# EAGLE board working (EAGLE 7.7.0)
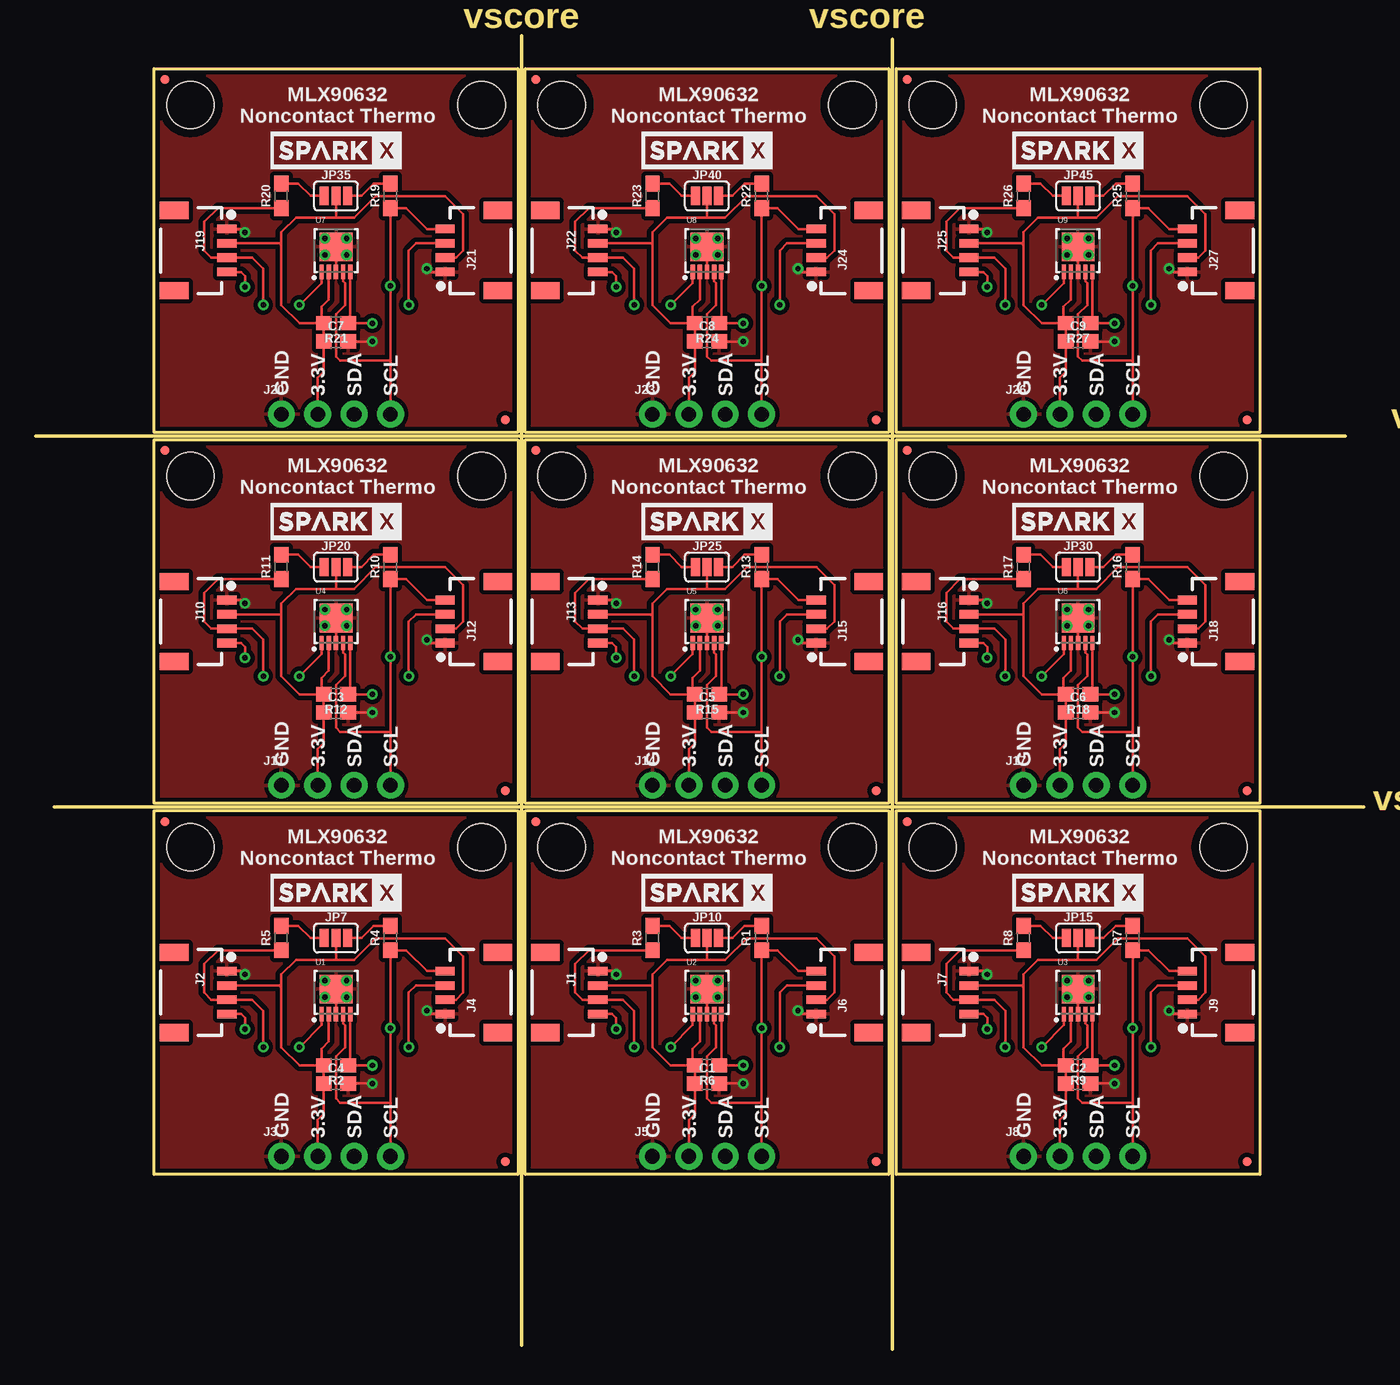
[diagram p0: board, top side]
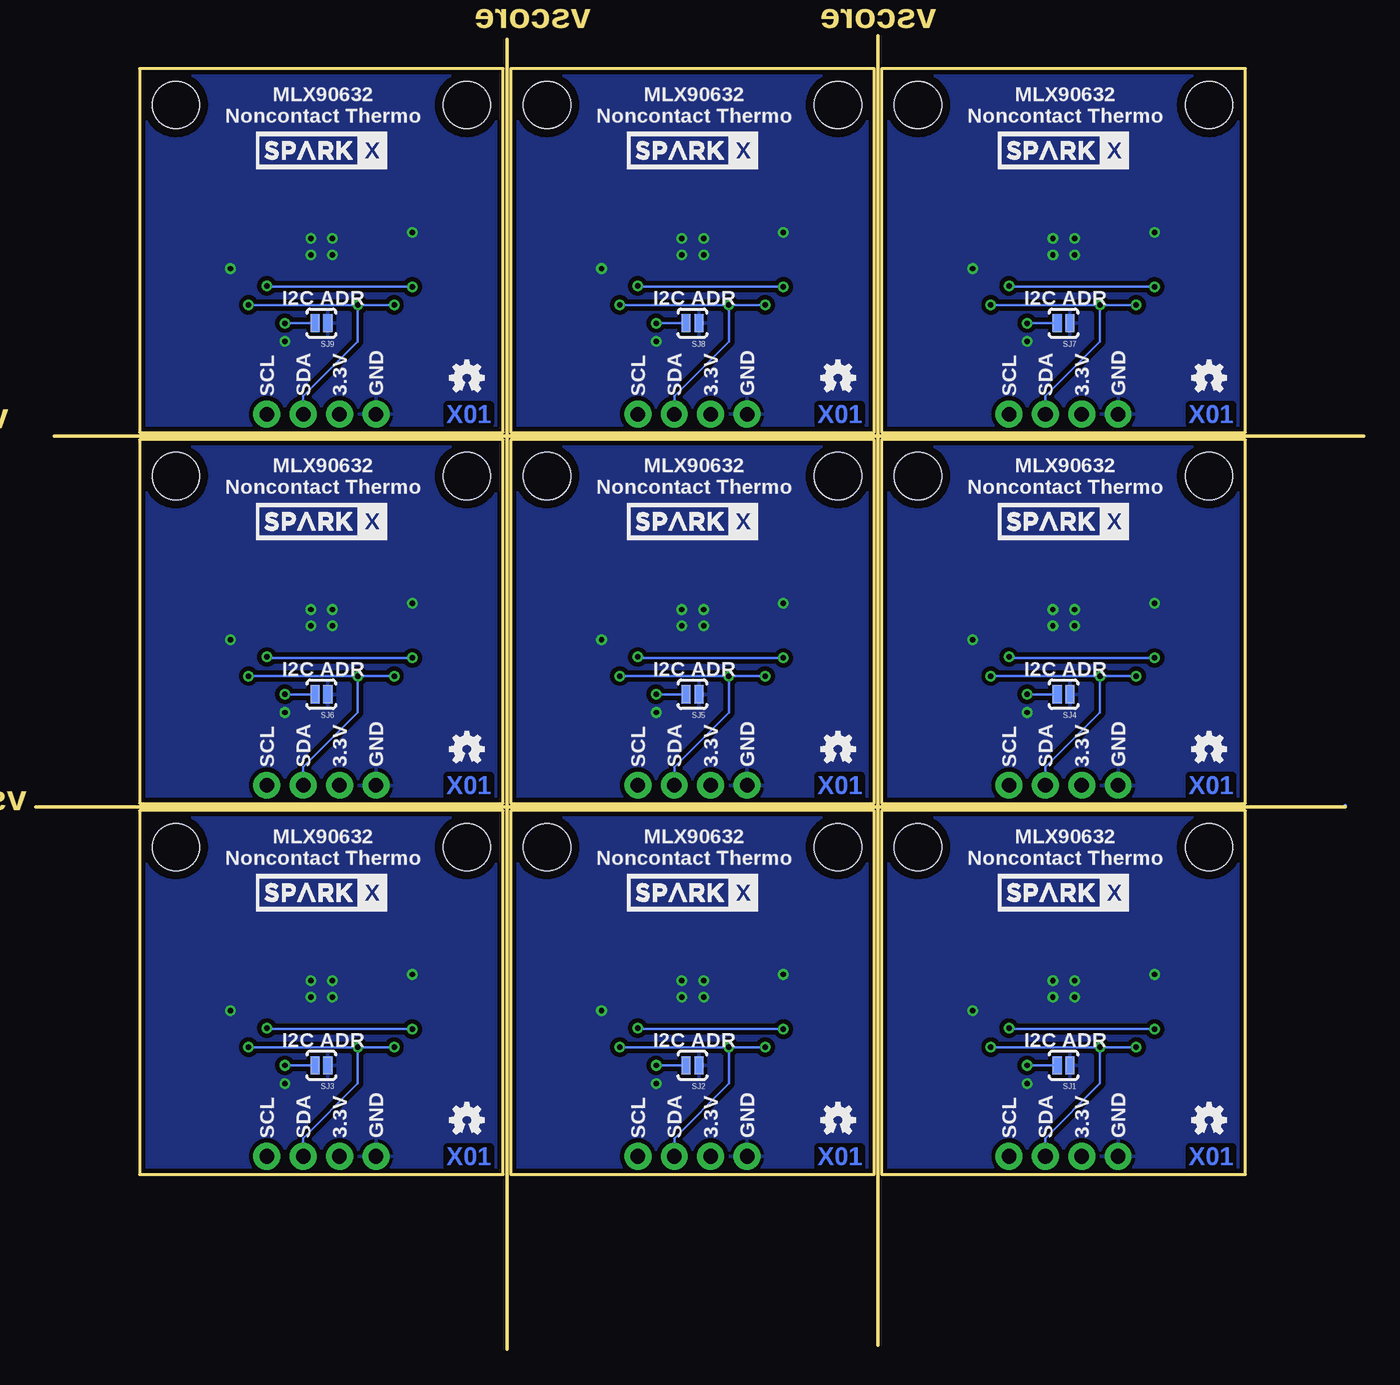
[diagram p1: board, bottom side, seen from below]

Size 92.71 x 91.69 mm. Coordinates in mm from the lower left corner, seen from the top.
Outline: 1.27,37.85 92.71,37.85
Outline: 0,63.75 91.44,63.75
Outline: 59.82,0 59.82,91.44
Outline: 33.91,0.25 33.91,91.69
Outline: 8.26,12.19 8.26,37.59 33.66,37.59 33.66,12.19 8.26,12.19
Outline: 34.16,12.19 34.16,37.59 59.56,37.59 59.56,12.19 34.16,12.19
Outline: 60.07,12.19 60.07,37.59 85.47,37.59 85.47,12.19 60.07,12.19
Outline: 8.26,38.1 8.26,63.5 33.66,63.5 33.66,38.1 8.26,38.1
Outline: 34.16,38.1 34.16,63.5 59.56,63.5 59.56,38.1 34.16,38.1
Outline: 60.07,38.1 60.07,63.5 85.47,63.5 85.47,38.1 60.07,38.1
Outline: 8.26,64.01 8.26,89.41 33.66,89.41 33.66,64.01 8.26,64.01
Outline: 34.16,64.01 34.16,89.41 59.56,89.41 59.56,64.01 34.16,64.01
Outline: 60.07,64.01 60.07,89.41 85.47,89.41 85.47,64.01 60.07,64.01
Copper layers (1*16): Top 0.035mm / dielectric 1.5mm / Bottom 0.035mm
Design rules "SparkFun-2-layer-TIGHT": minimum track width 7mil, minimum drill 15mil, track to track 7mil, track to pad 7mil, pad to pad 7mil, via to via 7mil, smd to smd 7mil, copper to edge 7mil, drill to drill 7mil, minimum pad ring 7mil, minimum via ring 7mil, stop-mask expansion 4mil, vias tented up to drill 25mil, thermal gap 10mil

## Footprints (pad centres in the part's own frame; a part is rotated, then mirrored left to right if it is on the bottom)
0603 = smd 1.1 x 1: 1 -0.85,0; 2 0.85,0
1X04_1MM_RA = smd 0.6 x 1.35: 1 -1.5,0; 2 -0.5,0; 3 0.5,0; 4 1.5,0 | smd 1.2 x 2: NC1 2.8,-3.675; NC2 -2.8,-3.675
1X04_NO_SILK = drill 1.016 pad 1.88: 1 0,0; 2 2.54,0; 3 5.08,0; 4 7.62,0
STAND-OFF = hole 3.302: 0,0
MICRO-FIDUCIAL = smd 0.635 x 0.635: 1 0,0
SMT-JUMPER_3_2-NC_PASTE_SILK = smd 0.635 x 1.27: 1 -0.813,0; 2 0,0; 3 0.813,0
SJ_2S-NO = smd 0.635 x 1.27: 1 -0.45,0; 2 0.45,0
MLX90632-3X3 = smd 0.3 x 1: 1 -1,-1.5; 2 -0.5,-1.5; 3 0,-1.5; 4 0.5,-1.5; 5 1,-1.5 | smd 2.3 x 2: 6 0,0.25

## Placement (x,y rotation side)
C1  0.1uF  [0603]  46.86,18.54 0 top
C2  0.1uF  [0603]  72.77,18.54 0 top
C3  0.1uF  [0603]  20.95,44.45 0 top
C4  0.1uF  [0603]  20.95,18.54 0 top
C5  0.1uF  [0603]  46.86,44.45 0 top
C6  0.1uF  [0603]  72.77,44.45 0 top
C7  0.1uF  [0603]  20.95,70.36 0 top
C8  0.1uF  [0603]  46.86,70.36 0 top
C9  0.1uF  [0603]  72.77,70.36 0 top
J1  SMD  [1X04_1MM_RA]  39.24,24.89 270 top
J2  SMD  [1X04_1MM_RA]  13.34,24.89 270 top
J3  PTH  [1X04_NO_SILK]  17.15,13.46 0 top
J4  SMD  [1X04_1MM_RA]  28.58,24.89 90 top
J5  PTH  [1X04_NO_SILK]  43.05,13.46 0 top
J6  SMD  [1X04_1MM_RA]  54.48,24.89 90 top
J7  SMD  [1X04_1MM_RA]  65.15,24.89 270 top
J8  PTH  [1X04_NO_SILK]  68.96,13.46 0 top
J9  SMD  [1X04_1MM_RA]  80.39,24.89 90 top
J10  SMD  [1X04_1MM_RA]  13.34,50.8 270 top
J11  PTH  [1X04_NO_SILK]  17.15,39.37 0 top
J12  SMD  [1X04_1MM_RA]  28.58,50.8 90 top
J13  SMD  [1X04_1MM_RA]  39.24,50.8 270 top
J14  PTH  [1X04_NO_SILK]  43.05,39.37 0 top
J15  SMD  [1X04_1MM_RA]  54.48,50.8 90 top
J16  SMD  [1X04_1MM_RA]  65.15,50.8 270 top
J17  PTH  [1X04_NO_SILK]  68.96,39.37 0 top
J18  SMD  [1X04_1MM_RA]  80.39,50.8 90 top
J19  SMD  [1X04_1MM_RA]  13.34,76.71 270 top
J20  PTH  [1X04_NO_SILK]  17.15,65.28 0 top
J21  SMD  [1X04_1MM_RA]  28.58,76.71 90 top
J22  SMD  [1X04_1MM_RA]  39.24,76.71 270 top
J23  PTH  [1X04_NO_SILK]  43.05,65.28 0 top
J24  SMD  [1X04_1MM_RA]  54.48,76.71 90 top
J25  SMD  [1X04_1MM_RA]  65.15,76.71 270 top
J26  PTH  [1X04_NO_SILK]  68.96,65.28 0 top
J27  SMD  [1X04_1MM_RA]  80.39,76.71 90 top
JP1  STAND-OFF  [STAND-OFF]  36.7,35.05 0 top
JP2  FIDUCIALUFIDUCIAL  [MICRO-FIDUCIAL]  32.77,13.08 0 top
JP3  STAND-OFF  [STAND-OFF]  10.8,35.05 0 top
JP4  STAND-OFF  [STAND-OFF]  31.12,35.05 0 top
JP5  STAND-OFF  [STAND-OFF]  57.02,35.05 0 top
JP6  FIDUCIALUFIDUCIAL  [MICRO-FIDUCIAL]  9.02,36.83 0 top
JP7  [SMT-JUMPER_3_2-NC_PASTE_SILK]  20.95,28.7 0 top
JP8  FIDUCIALUFIDUCIAL  [MICRO-FIDUCIAL]  58.67,13.08 0 top
JP9  FIDUCIALUFIDUCIAL  [MICRO-FIDUCIAL]  34.93,36.83 0 top
JP10  [SMT-JUMPER_3_2-NC_PASTE_SILK]  46.86,28.7 0 top
JP11  STAND-OFF  [STAND-OFF]  62.61,35.05 0 top
JP12  STAND-OFF  [STAND-OFF]  82.93,35.05 0 top
JP13  FIDUCIALUFIDUCIAL  [MICRO-FIDUCIAL]  84.58,13.08 0 top
JP14  FIDUCIALUFIDUCIAL  [MICRO-FIDUCIAL]  60.83,36.83 0 top
JP15  [SMT-JUMPER_3_2-NC_PASTE_SILK]  72.77,28.7 0 top
JP16  STAND-OFF  [STAND-OFF]  10.8,60.96 0 top
JP17  STAND-OFF  [STAND-OFF]  31.12,60.96 0 top
JP18  FIDUCIALUFIDUCIAL  [MICRO-FIDUCIAL]  32.77,38.99 0 top
JP19  FIDUCIALUFIDUCIAL  [MICRO-FIDUCIAL]  9.02,62.74 0 top
JP20  [SMT-JUMPER_3_2-NC_PASTE_SILK]  20.95,54.61 0 top
JP21  STAND-OFF  [STAND-OFF]  36.7,60.96 0 top
JP22  STAND-OFF  [STAND-OFF]  57.02,60.96 0 top
JP23  FIDUCIALUFIDUCIAL  [MICRO-FIDUCIAL]  58.67,38.99 0 top
JP24  FIDUCIALUFIDUCIAL  [MICRO-FIDUCIAL]  34.93,62.74 0 top
JP25  [SMT-JUMPER_3_2-NC_PASTE_SILK]  46.86,54.61 0 top
JP26  STAND-OFF  [STAND-OFF]  62.61,60.96 0 top
JP27  STAND-OFF  [STAND-OFF]  82.93,60.96 0 top
JP28  FIDUCIALUFIDUCIAL  [MICRO-FIDUCIAL]  84.58,38.99 0 top
JP29  FIDUCIALUFIDUCIAL  [MICRO-FIDUCIAL]  60.83,62.74 0 top
JP30  [SMT-JUMPER_3_2-NC_PASTE_SILK]  72.77,54.61 0 top
JP31  STAND-OFF  [STAND-OFF]  10.8,86.87 0 top
JP32  STAND-OFF  [STAND-OFF]  31.12,86.87 0 top
JP33  FIDUCIALUFIDUCIAL  [MICRO-FIDUCIAL]  32.77,64.9 0 top
JP34  FIDUCIALUFIDUCIAL  [MICRO-FIDUCIAL]  9.02,88.65 0 top
JP35  [SMT-JUMPER_3_2-NC_PASTE_SILK]  20.95,80.52 0 top
JP36  STAND-OFF  [STAND-OFF]  36.7,86.87 0 top
JP37  STAND-OFF  [STAND-OFF]  57.02,86.87 0 top
JP38  FIDUCIALUFIDUCIAL  [MICRO-FIDUCIAL]  58.67,64.9 0 top
JP39  FIDUCIALUFIDUCIAL  [MICRO-FIDUCIAL]  34.93,88.65 0 top
JP40  [SMT-JUMPER_3_2-NC_PASTE_SILK]  46.86,80.52 0 top
JP41  STAND-OFF  [STAND-OFF]  62.61,86.87 0 top
JP42  STAND-OFF  [STAND-OFF]  82.93,86.87 0 top
JP43  FIDUCIALUFIDUCIAL  [MICRO-FIDUCIAL]  84.58,64.9 0 top
JP44  FIDUCIALUFIDUCIAL  [MICRO-FIDUCIAL]  60.83,88.65 0 top
JP45  [SMT-JUMPER_3_2-NC_PASTE_SILK]  72.77,80.52 0 top
LOGO1  OSHW-LOGOMINI  [OSHW-LOGO-MINI]  10.8,16 0 bottom
LOGO2  OSHW-LOGOMINI  [OSHW-LOGO-MINI]  36.7,16 0 bottom
LOGO3  OSHW-LOGOMINI  [OSHW-LOGO-MINI]  62.61,16 0 bottom
LOGO4  OSHW-LOGOMINI  [OSHW-LOGO-MINI]  10.8,41.91 0 bottom
LOGO5  OSHW-LOGOMINI  [OSHW-LOGO-MINI]  36.7,41.91 0 bottom
LOGO6  OSHW-LOGOMINI  [OSHW-LOGO-MINI]  62.61,41.91 0 bottom
LOGO7  OSHW-LOGOMINI  [OSHW-LOGO-MINI]  10.8,67.82 0 bottom
LOGO8  OSHW-LOGOMINI  [OSHW-LOGO-MINI]  36.7,67.82 0 bottom
LOGO9  OSHW-LOGOMINI  [OSHW-LOGO-MINI]  62.61,67.82 0 bottom
R1  4.7k  [0603]  50.67,28.7 90 top
R2  10k  [0603]  20.95,19.81 180 top
R3  4.7k  [0603]  43.05,28.7 90 top
R4  4.7k  [0603]  24.77,28.7 90 top
R5  4.7k  [0603]  17.15,28.7 90 top
R6  10k  [0603]  46.86,19.81 180 top
R7  4.7k  [0603]  76.58,28.7 90 top
R8  4.7k  [0603]  68.96,28.7 90 top
R9  10k  [0603]  72.77,19.81 180 top
R10  4.7k  [0603]  24.77,54.61 90 top
R11  4.7k  [0603]  17.15,54.61 90 top
R12  10k  [0603]  20.95,45.72 180 top
R13  4.7k  [0603]  50.67,54.61 90 top
R14  4.7k  [0603]  43.05,54.61 90 top
R15  10k  [0603]  46.86,45.72 180 top
R16  4.7k  [0603]  76.58,54.61 90 top
R17  4.7k  [0603]  68.96,54.61 90 top
R18  10k  [0603]  72.77,45.72 180 top
R19  4.7k  [0603]  24.77,80.52 90 top
R20  4.7k  [0603]  17.15,80.52 90 top
R21  10k  [0603]  20.95,71.63 180 top
R22  4.7k  [0603]  50.67,80.52 90 top
R23  4.7k  [0603]  43.05,80.52 90 top
R24  10k  [0603]  46.86,71.63 180 top
R25  4.7k  [0603]  76.58,80.52 90 top
R26  4.7k  [0603]  68.96,80.52 90 top
R27  10k  [0603]  72.77,71.63 180 top
SJ1  [SJ_2S-NO]  20.95,19.81 180 bottom
SJ2  [SJ_2S-NO]  46.86,19.81 180 bottom
SJ3  [SJ_2S-NO]  72.77,19.81 180 bottom
SJ4  [SJ_2S-NO]  20.95,45.72 180 bottom
SJ5  [SJ_2S-NO]  46.86,45.72 180 bottom
SJ6  [SJ_2S-NO]  72.77,45.72 180 bottom
SJ7  [SJ_2S-NO]  20.95,71.63 180 bottom
SJ8  [SJ_2S-NO]  46.86,71.63 180 bottom
SJ9  [SJ_2S-NO]  72.77,71.63 180 bottom
U1  MLX90632  [MLX90632-3X3]  20.95,24.89 0 top
U2  MLX90632  [MLX90632-3X3]  46.86,24.89 0 top
U3  MLX90632  [MLX90632-3X3]  72.77,24.89 0 top
U4  MLX90632  [MLX90632-3X3]  20.95,50.8 0 top
U5  MLX90632  [MLX90632-3X3]  46.86,50.8 0 top
U6  MLX90632  [MLX90632-3X3]  72.77,50.8 0 top
U7  MLX90632  [MLX90632-3X3]  20.95,76.71 0 top
U8  MLX90632  [MLX90632-3X3]  46.86,76.71 0 top
U9  MLX90632  [MLX90632-3X3]  72.77,76.71 0 top
U$1  SPARKX-LOGO4  [SPARKX-MEDIUM]  20.95,31.88 0 bottom
U$2  SPARKX-LOGO4  [SPARKX-MEDIUM]  20.95,31.88 0 top
U$3  SPARKX-LOGO4  [SPARKX-MEDIUM]  46.86,31.88 0 top
U$4  SPARKX-LOGO4  [SPARKX-MEDIUM]  46.86,31.88 0 bottom
U$5  SPARKX-LOGO4  [SPARKX-MEDIUM]  72.77,31.88 0 top
U$6  SPARKX-LOGO4  [SPARKX-MEDIUM]  72.77,31.88 0 bottom
U$7  SPARKX-LOGO4  [SPARKX-MEDIUM]  20.95,57.79 0 top
U$8  SPARKX-LOGO4  [SPARKX-MEDIUM]  20.95,57.79 0 bottom
U$9  SPARKX-LOGO4  [SPARKX-MEDIUM]  46.86,57.79 0 top
U$10  SPARKX-LOGO4  [SPARKX-MEDIUM]  46.86,57.79 0 bottom
U$11  SPARKX-LOGO4  [SPARKX-MEDIUM]  72.77,57.79 0 top
U$12  SPARKX-LOGO4  [SPARKX-MEDIUM]  72.77,57.79 0 bottom
U$13  SPARKX-LOGO4  [SPARKX-MEDIUM]  20.95,83.69 0 top
U$14  SPARKX-LOGO4  [SPARKX-MEDIUM]  20.95,83.69 0 bottom
U$15  SPARKX-LOGO4  [SPARKX-MEDIUM]  46.86,83.69 0 top
U$16  SPARKX-LOGO4  [SPARKX-MEDIUM]  46.86,83.69 0 bottom
U$17  SPARKX-LOGO4  [SPARKX-MEDIUM]  72.77,83.69 0 top
U$18  SPARKX-LOGO4  [SPARKX-MEDIUM]  72.77,83.69 0 bottom

## Library data of the parts
C1-C9 = SparkFun-Capacitors; PROD_ID: CAP-00810
J1-J27 U$1-U$18 = SparkX
JP1-JP6 JP8 JP9 JP11-JP14 JP16-JP19 JP21-JP24 JP26-JP29 JP31-JP34 JP36-JP39 JP41-JP44 SJ1-SJ9 = SparkFun
JP7 JP10 JP15 JP20 JP25 JP30 JP35 JP40 JP45 = SparkFun-Jumpers
LOGO1-LOGO9 = SparkFun-Aesthetics
R1 R3-R5 R7 R8 R10 R11 R13 R14 R16 R17 R19 R20 R22 R23 R25 R26 = SparkFun-Resistors; PROD_ID: RES-07857
R2 R6 R9 R12 R15 R18 R21 R24 R27 = SparkFun-Resistors; PROD_ID: RES-00824
U1-U9 = MLX90632

## Nets
3.3V: C4.1 J2.2 J3.2 J4.2 JP7.2 R2.2 U1.2
3.3V1: C1.1 J1.2 J5.2 J6.2 JP10.2 R6.2 U2.2
3.3V2: C2.1 J7.2 J8.2 J9.2 JP15.2 R9.2 U3.2
3.3V3: C3.1 J10.2 J11.2 J12.2 JP20.2 R12.2 U4.2
3.3V4: C5.1 J13.2 J14.2 J15.2 JP25.2 R15.2 U5.2
3.3V5: C6.1 J16.2 J17.2 J18.2 JP30.2 R18.2 U6.2
3.3V6: C7.1 J19.2 J20.2 J21.2 JP35.2 R21.2 U7.2
3.3V7: C8.1 J22.2 J23.2 J24.2 JP40.2 R24.2 U8.2
3.3V8: C9.1 J25.2 J26.2 J27.2 JP45.2 R27.2 U9.2
ADDR: R2.1 SJ1.2 U1.5
ADDR1: R6.1 SJ2.2 U2.5
ADDR2: R9.1 SJ3.2 U3.5
ADDR3: R12.1 SJ4.2 U4.5
ADDR4: R15.1 SJ5.2 U5.5
ADDR5: R18.1 SJ6.2 U6.5
ADDR6: R21.1 SJ7.2 U7.5
ADDR7: R24.1 SJ8.2 U8.5
ADDR8: R27.1 SJ9.2 U9.5
GND: C4.2 J2.1 J3.1 J4.1 SJ1.1 U1.3 U1.6
GND1: C1.2 J1.1 J5.1 J6.1 SJ2.1 U2.3 U2.6
GND2: C2.2 J7.1 J8.1 J9.1 SJ3.1 U3.3 U3.6
GND3: C3.2 J10.1 J11.1 J12.1 SJ4.1 U4.3 U4.6
GND4: C5.2 J13.1 J14.1 J15.1 SJ5.1 U5.3 U5.6
GND5: C6.2 J16.1 J17.1 J18.1 SJ6.1 U6.3 U6.6
GND6: C7.2 J19.1 J20.1 J21.1 SJ7.1 U7.3 U7.6
GND7: C8.2 J22.1 J23.1 J24.1 SJ8.1 U8.3 U8.6
GND8: C9.2 J25.1 J26.1 J27.1 SJ9.1 U9.3 U9.6
N$1: JP7.1 R5.2
N$2: JP7.3 R4.2
N$3: JP10.1 R3.2
N$4: JP10.3 R1.2
N$5: JP15.1 R8.2
N$6: JP15.3 R7.2
N$7: JP20.1 R11.2
N$8: JP20.3 R10.2
N$9: JP25.1 R14.2
N$10: JP25.3 R13.2
N$11: JP30.1 R17.2
N$12: JP30.3 R16.2
N$13: JP35.1 R20.2
N$14: JP35.3 R19.2
N$15: JP40.1 R23.2
N$16: JP40.3 R22.2
N$17: JP45.1 R26.2
N$18: JP45.3 R25.2
SCL: J2.4 J3.4 J4.4 R4.1 U1.4
SCL1: J1.4 J5.4 J6.4 R1.1 U2.4
SCL2: J7.4 J8.4 J9.4 R7.1 U3.4
SCL3: J10.4 J11.4 J12.4 R10.1 U4.4
SCL4: J13.4 J14.4 J15.4 R13.1 U5.4
SCL5: J16.4 J17.4 J18.4 R16.1 U6.4
SCL6: J19.4 J20.4 J21.4 R19.1 U7.4
SCL7: J22.4 J23.4 J24.4 R22.1 U8.4
SCL8: J25.4 J26.4 J27.4 R25.1 U9.4
SDA: J2.3 J3.3 J4.3 R5.1 U1.1
SDA1: J1.3 J5.3 J6.3 R3.1 U2.1
SDA2: J7.3 J8.3 J9.3 R8.1 U3.1
SDA3: J10.3 J11.3 J12.3 R11.1 U4.1
SDA4: J13.3 J14.3 J15.3 R14.1 U5.1
SDA5: J16.3 J17.3 J18.3 R17.1 U6.1
SDA6: J19.3 J20.3 J21.3 R20.1 U7.1
SDA7: J22.3 J23.3 J24.3 R23.1 U8.1
SDA8: J25.3 J26.3 J27.3 R26.1 U9.1

## Tracks (layer width: path | path; a pad name or v marks a point on that pad's centre or on a via)
3.3V
  Top 0.178: U1.2 20.45,21.47 19.94,20.95 19.94,19.98 R2.2 | J3.2 19.69,16 20.11,16.42 R2.2 | R2.2 18.41,19.81 17.15,21.08 17.15,25.27 | 17.15,25.27 17.15,26.16 18.16,27.18 20.95,27.18 | J2.2 17.03,25.39 17.15,25.27 | J4.2 29.34,24.39 29.84,24.89 29.84,27.43 28.59,28.69 23.74,28.69 22.23,27.18 20.95,27.18 | JP7.2 20.95,27.18 | R2.2 C4.1
3.3V1
  Top 0.178: U2.2 46.36,21.47 45.85,20.95 45.85,19.98 R6.2 | J5.2 45.59,16 46.01,16.42 R6.2 | R6.2 44.32,19.81 43.05,21.08 43.05,25.27 | 43.05,25.27 43.05,26.16 44.07,27.18 46.86,27.18 | J1.2 42.93,25.39 43.05,25.27 | J6.2 55.25,24.39 55.75,24.89 55.75,27.43 54.49,28.69 49.65,28.69 48.13,27.18 46.86,27.18 | JP10.2 46.86,27.18 | R6.2 C1.1
3.3V2
  Top 0.178: U3.2 72.27,21.47 71.75,20.95 71.75,19.98 R9.2 | J8.2 71.5,16 71.92,16.42 R9.2 | R9.2 70.23,19.81 68.96,21.08 68.96,25.27 | 68.96,25.27 68.96,26.16 69.98,27.18 72.77,27.18 | J7.2 68.84,25.39 68.96,25.27 | J9.2 81.16,24.39 81.66,24.89 81.66,27.43 80.4,28.69 75.55,28.69 74.04,27.18 72.77,27.18 | JP15.2 72.77,27.18 | R9.2 C2.1
3.3V3
  Top 0.178: U4.2 20.45,47.38 19.94,46.86 19.94,45.89 R12.2 | J11.2 19.69,41.91 20.11,42.33 R12.2 | R12.2 18.41,45.72 17.15,46.99 17.15,51.18 | 17.15,51.18 17.15,52.07 18.16,53.09 20.95,53.09 | J10.2 17.03,51.3 17.15,51.18 | J12.2 29.34,50.3 29.84,50.8 29.84,53.34 28.59,54.6 23.74,54.6 22.23,53.09 20.95,53.09 | JP20.2 20.95,53.09 | R12.2 C3.1
3.3V4
  Top 0.178: U5.2 46.36,47.38 45.85,46.86 45.85,45.89 R15.2 | J14.2 45.59,41.91 46.01,42.33 R15.2 | R15.2 44.32,45.72 43.05,46.99 43.05,51.18 | 43.05,51.18 43.05,52.07 44.07,53.09 46.86,53.09 | J13.2 42.93,51.3 43.05,51.18 | J15.2 55.25,50.3 55.75,50.8 55.75,53.34 54.49,54.6 49.65,54.6 48.13,53.09 46.86,53.09 | JP25.2 46.86,53.09 | R15.2 C5.1
3.3V5
  Top 0.178: U6.2 72.27,47.38 71.75,46.86 71.75,45.89 R18.2 | J17.2 71.5,41.91 71.92,42.33 R18.2 | R18.2 70.23,45.72 68.96,46.99 68.96,51.18 | 68.96,51.18 68.96,52.07 69.98,53.09 72.77,53.09 | J16.2 68.84,51.3 68.96,51.18 | J18.2 81.16,50.3 81.66,50.8 81.66,53.34 80.4,54.6 75.55,54.6 74.04,53.09 72.77,53.09 | JP30.2 72.77,53.09 | R18.2 C6.1
3.3V6
  Top 0.178: U7.2 20.45,73.29 19.94,72.77 19.94,71.79 R21.2 | J20.2 19.69,67.82 20.11,68.24 R21.2 | R21.2 18.41,71.63 17.15,72.9 17.15,77.09 | 17.15,77.09 17.15,77.98 18.16,78.99 20.95,78.99 | J19.2 17.03,77.21 17.15,77.09 | J21.2 29.34,76.21 29.84,76.71 29.84,79.25 28.59,80.51 23.74,80.51 22.23,78.99 20.95,78.99 | JP35.2 20.95,78.99 | R21.2 C7.1
3.3V7
  Top 0.178: U8.2 46.36,73.29 45.85,72.77 45.85,71.79 R24.2 | J23.2 45.59,67.82 46.01,68.24 R24.2 | R24.2 44.32,71.63 43.05,72.9 43.05,77.09 | 43.05,77.09 43.05,77.98 44.07,78.99 46.86,78.99 | J22.2 42.93,77.21 43.05,77.09 | J24.2 55.25,76.21 55.75,76.71 55.75,79.25 54.49,80.51 49.65,80.51 48.13,78.99 46.86,78.99 | JP40.2 46.86,78.99 | R24.2 C8.1
3.3V8
  Top 0.178: U9.2 72.27,73.29 71.75,72.77 71.75,71.79 R27.2 | J26.2 71.5,67.82 71.92,68.24 R27.2 | R27.2 70.23,71.63 68.96,72.9 68.96,77.09 | 68.96,77.09 68.96,77.98 69.98,78.99 72.77,78.99 | J25.2 68.84,77.21 68.96,77.09 | J27.2 81.16,76.21 81.66,76.71 81.66,79.25 80.4,80.51 75.55,80.51 74.04,78.99 72.77,78.99 | JP45.2 72.77,78.99 | R27.2 C9.1
ADDR  (via drill 0.38)
  Top 0.178: U1.5 21.95,19.96 R2.1 v23.5,19.81
  Bottom 0.178: SJ1.2 v23.5,19.81
ADDR1  (via drill 0.38)
  Top 0.178: U2.5 47.86,19.96 R6.1 v49.4,19.81
  Bottom 0.178: SJ2.2 v49.4,19.81
ADDR2  (via drill 0.38)
  Top 0.178: U3.5 73.77,19.96 R9.1 v75.31,19.81
  Bottom 0.178: SJ3.2 v75.31,19.81
ADDR3  (via drill 0.38)
  Top 0.178: U4.5 21.95,45.87 R12.1 v23.5,45.72
  Bottom 0.178: SJ4.2 v23.5,45.72
ADDR4  (via drill 0.38)
  Top 0.178: U5.5 47.86,45.87 R15.1 v49.4,45.72
  Bottom 0.178: SJ5.2 v49.4,45.72
ADDR5  (via drill 0.38)
  Top 0.178: U6.5 73.77,45.87 R18.1 v75.31,45.72
  Bottom 0.178: SJ6.2 v75.31,45.72
ADDR6  (via drill 0.38)
  Top 0.178: U7.5 21.95,71.78 R21.1 v23.5,71.63
  Bottom 0.178: SJ7.2 v23.5,71.63
ADDR7  (via drill 0.38)
  Top 0.178: U8.5 47.86,71.78 R24.1 v49.4,71.63
  Bottom 0.178: SJ8.2 v49.4,71.63
ADDR8  (via drill 0.38)
  Top 0.178: U9.5 73.77,71.78 R27.1 v75.31,71.63
  Bottom 0.178: SJ9.2 v75.31,71.63
GND  (via drill 0.38)
  Top 0.178: U1.3 U1.6 21.15,25.14 v21.7,24.59 | J4.1 27.54,23.39 v27.3,23.62 | J2.1 14.38,26.39 v14.61,26.16 | C4.2 v23.5,18.54
  other vias: 20.18,25.73 21.7,25.73 20.18,24.59
  pour Bottom (isolate 0.305): 8.26,12.19 8.26,37.59 33.66,37.59 33.66,12.19
  pour Top (isolate 0.305): 8.26,12.19 8.26,37.59 33.66,37.59 33.66,12.19
GND1  (via drill 0.38)
  Top 0.178: U2.3 U2.6 47.05,25.14 v47.61,24.59 | J6.1 53.44,23.39 v53.21,23.62 | J1.1 40.28,26.39 v40.51,26.16 | C1.2 v49.4,18.54
  other vias: 46.09,25.73 47.61,25.73 46.09,24.59
  pour Bottom (isolate 0.305): 34.16,12.19 34.16,37.59 59.56,37.59 59.56,12.19
  pour Top (isolate 0.305): 34.16,12.19 34.16,37.59 59.56,37.59 59.56,12.19
GND2  (via drill 0.38)
  Top 0.178: U3.3 U3.6 72.96,25.14 v73.52,24.59 | J9.1 79.35,23.39 v79.12,23.62 | J7.1 66.19,26.39 v66.42,26.16 | C2.2 v75.31,18.54
  other vias: 71.99,25.73 73.52,25.73 71.99,24.59
  pour Bottom (isolate 0.305): 60.07,12.19 60.07,37.59 85.47,37.59 85.47,12.19
  pour Top (isolate 0.305): 60.07,12.19 60.07,37.59 85.47,37.59 85.47,12.19
GND3  (via drill 0.38)
  Top 0.178: U4.3 U4.6 21.15,51.05 v21.7,50.5 | J12.1 27.54,49.3 v27.3,49.53 | J10.1 14.38,52.3 v14.61,52.07 | C3.2 v23.5,44.45
  other vias: 20.18,51.64 21.7,51.64 20.18,50.5
  pour Bottom (isolate 0.305): 8.26,38.1 8.26,63.5 33.66,63.5 33.66,38.1
  pour Top (isolate 0.305): 8.26,38.1 8.26,63.5 33.66,63.5 33.66,38.1
GND4  (via drill 0.38)
  Top 0.178: U5.3 U5.6 47.05,51.05 v47.61,50.5 | J15.1 53.44,49.3 v53.21,49.53 | J13.1 40.28,52.3 v40.51,52.07 | C5.2 v49.4,44.45
  other vias: 46.09,51.64 47.61,51.64 46.09,50.5
  pour Bottom (isolate 0.305): 34.16,38.1 34.16,63.5 59.56,63.5 59.56,38.1
  pour Top (isolate 0.305): 34.16,38.1 34.16,63.5 59.56,63.5 59.56,38.1
GND5  (via drill 0.38)
  Top 0.178: U6.3 U6.6 72.96,51.05 v73.52,50.5 | J18.1 79.35,49.3 v79.12,49.53 | J16.1 66.19,52.3 v66.42,52.07 | C6.2 v75.31,44.45
  other vias: 71.99,51.64 73.52,51.64 71.99,50.5
  pour Bottom (isolate 0.305): 60.07,38.1 60.07,63.5 85.47,63.5 85.47,38.1
  pour Top (isolate 0.305): 60.07,38.1 60.07,63.5 85.47,63.5 85.47,38.1
GND6  (via drill 0.38)
  Top 0.178: U7.3 U7.6 21.15,76.96 v21.7,76.4 | J21.1 27.54,75.21 v27.3,75.44 | J19.1 14.38,78.21 v14.61,77.98 | C7.2 v23.5,70.36
  other vias: 20.18,77.55 21.7,77.55 20.18,76.4
  pour Bottom (isolate 0.305): 8.26,64.01 8.26,89.41 33.66,89.41 33.66,64.01
  pour Top (isolate 0.305): 8.26,64.01 8.26,89.41 33.66,89.41 33.66,64.01
GND7  (via drill 0.38)
  Top 0.178: U8.3 U8.6 47.05,76.96 v47.61,76.4 | J24.1 53.44,75.21 v53.21,75.44 | J22.1 40.28,78.21 v40.51,77.98 | C8.2 v49.4,70.36
  other vias: 46.09,77.55 47.61,77.55 46.09,76.4
  pour Bottom (isolate 0.305): 34.16,64.01 34.16,89.41 59.56,89.41 59.56,64.01
  pour Top (isolate 0.305): 34.16,64.01 34.16,89.41 59.56,89.41 59.56,64.01
GND8  (via drill 0.38)
  Top 0.178: U9.3 U9.6 72.96,76.96 v73.52,76.4 | J27.1 79.35,75.21 v79.12,75.44 | J25.1 66.19,78.21 v66.42,77.98 | C9.2 v75.31,70.36
  other vias: 71.99,77.55 73.52,77.55 71.99,76.4
  pour Bottom (isolate 0.305): 60.07,64.01 60.07,89.41 85.47,89.41 85.47,64.01
  pour Top (isolate 0.305): 60.07,64.01 60.07,89.41 85.47,89.41 85.47,64.01
N$1
  Top 0.178: JP7.1 19.18,28.7 18.33,29.55 R5.2
N$2
  Top 0.178: JP7.3 22.73,28.7 23.58,29.55 R4.2
N$3
  Top 0.178: JP10.1 45.09,28.7 44.23,29.55 R3.2
N$4
  Top 0.178: JP10.3 48.64,28.7 49.49,29.55 R1.2
N$5
  Top 0.178: JP15.1 70.99,28.7 70.14,29.55 R8.2
N$6
  Top 0.178: JP15.3 74.55,28.7 75.4,29.55 R7.2
N$7
  Top 0.178: JP20.1 19.18,54.61 18.33,55.46 R11.2
N$8
  Top 0.178: JP20.3 22.73,54.61 23.58,55.46 R10.2
N$9
  Top 0.178: JP25.1 45.09,54.61 44.23,55.46 R14.2
N$10
  Top 0.178: JP25.3 48.64,54.61 49.49,55.46 R13.2
N$11
  Top 0.178: JP30.1 70.99,54.61 70.14,55.46 R17.2
N$12
  Top 0.178: JP30.3 74.55,54.61 75.4,55.46 R16.2
N$13
  Top 0.178: JP35.1 19.18,80.52 18.33,81.37 R20.2
N$14
  Top 0.178: JP35.3 22.73,80.52 23.58,81.37 R19.2
N$15
  Top 0.178: JP40.1 45.09,80.52 44.23,81.37 R23.2
N$16
  Top 0.178: JP40.3 48.64,80.52 49.49,81.37 R22.2
N$17
  Top 0.178: JP45.1 70.99,80.52 70.14,81.37 R26.2
N$18
  Top 0.178: JP45.3 74.55,80.52 75.4,81.37 R25.2
S$1
  Bottom 0.254: 1.27,37.97 1.27,37.85
SCL  (via drill 0.38)
  Top 0.178: J4.4 27.33,26.39 25.87,27.85 R4.1 v24.77,22.42 24.77,17.19 | U1.4 21.45,22.74 21.59,22.61 21.59,21.08 20.95,20.45 20.95,17.49 21.26,17.19 24.77,17.19 | J2.4 14.33,23.39 14.61,23.11 v14.61,22.35 | 24.77,17.19 J3.4
  Bottom 0.178: v14.61,22.35 24.7,22.35 v24.77,22.42
SCL1  (via drill 0.38)
  Top 0.178: J6.4 53.24,26.39 51.78,27.85 R1.1 v50.67,22.42 50.67,17.19 | U2.4 47.36,22.74 47.5,22.61 47.5,21.08 46.86,20.45 46.86,17.49 47.16,17.19 50.67,17.19 | J1.4 40.23,23.39 40.51,23.11 v40.51,22.35 | 50.67,17.19 J5.4
  Bottom 0.178: v40.51,22.35 50.6,22.35 v50.67,22.42
SCL2  (via drill 0.38)
  Top 0.178: J9.4 79.14,26.39 77.69,27.85 R7.1 v76.58,22.42 76.58,17.19 | U3.4 73.27,22.74 73.41,22.61 73.41,21.08 72.77,20.45 72.77,17.49 73.07,17.19 76.58,17.19 | J7.4 66.14,23.39 66.42,23.11 v66.42,22.35 | 76.58,17.19 J8.4
  Bottom 0.178: v66.42,22.35 76.51,22.35 v76.58,22.42
SCL3  (via drill 0.38)
  Top 0.178: J12.4 27.33,52.3 25.87,53.76 R10.1 v24.77,48.33 24.77,43.1 | U4.4 21.45,48.65 21.59,48.51 21.59,46.99 20.95,46.35 20.95,43.4 21.26,43.1 24.77,43.1 | J10.4 14.33,49.3 14.61,49.02 v14.61,48.26 | 24.77,43.1 J11.4
  Bottom 0.178: v14.61,48.26 24.7,48.26 v24.77,48.33
SCL4  (via drill 0.38)
  Top 0.178: J15.4 53.24,52.3 51.78,53.76 R13.1 v50.67,48.33 50.67,43.1 | U5.4 47.36,48.65 47.5,48.51 47.5,46.99 46.86,46.35 46.86,43.4 47.16,43.1 50.67,43.1 | J13.4 40.23,49.3 40.51,49.02 v40.51,48.26 | 50.67,43.1 J14.4
  Bottom 0.178: v40.51,48.26 50.6,48.26 v50.67,48.33
SCL5  (via drill 0.38)
  Top 0.178: J18.4 79.14,52.3 77.69,53.76 R16.1 v76.58,48.33 76.58,43.1 | U6.4 73.27,48.65 73.41,48.51 73.41,46.99 72.77,46.35 72.77,43.4 73.07,43.1 76.58,43.1 | J16.4 66.14,49.3 66.42,49.02 v66.42,48.26 | 76.58,43.1 J17.4
  Bottom 0.178: v66.42,48.26 76.51,48.26 v76.58,48.33
SCL6  (via drill 0.38)
  Top 0.178: J21.4 27.33,78.21 25.87,79.67 R19.1 v24.77,74.24 24.77,69.01 | U7.4 21.45,74.56 21.59,74.42 21.59,72.9 20.95,72.26 20.95,69.31 21.26,69.01 24.77,69.01 | J19.4 14.33,75.21 14.61,74.93 v14.61,74.17 | 24.77,69.01 J20.4
  Bottom 0.178: v14.61,74.17 24.7,74.17 v24.77,74.24
SCL7  (via drill 0.38)
  Top 0.178: J24.4 53.24,78.21 51.78,79.67 R22.1 v50.67,74.24 50.67,69.01 | U8.4 47.36,74.56 47.5,74.42 47.5,72.9 46.86,72.26 46.86,69.31 47.16,69.01 50.67,69.01 | J22.4 40.23,75.21 40.51,74.93 v40.51,74.17 | 50.67,69.01 J23.4
  Bottom 0.178: v40.51,74.17 50.6,74.17 v50.67,74.24
SCL8  (via drill 0.38)
  Top 0.178: J27.4 79.14,78.21 77.69,79.67 R25.1 v76.58,74.24 76.58,69.01 | U9.4 73.27,74.56 73.41,74.42 73.41,72.9 72.77,72.26 72.77,69.31 73.07,69.01 76.58,69.01 | J25.4 66.14,75.21 66.42,74.93 v66.42,74.17 | 76.58,69.01 J26.4
  Bottom 0.178: v66.42,74.17 76.51,74.17 v76.58,74.24
SDA  (via drill 0.38)
  Top 0.178: v15.88,21.08 15.88,23.62 15.11,24.39 J2.3 12.26,24.39 11.76,24.89 11.76,26.89 12.71,27.85 R5.1 | J4.3 26.54,25.39 26.04,24.89 v26.04,21.08 | U1.1 19.95,22.62 v18.41,21.08
  Bottom 0.178: J3.3 22.23,14.73 18.41,18.54 v18.41,21.08 | v15.88,21.08 v18.41,21.08 | v26.04,21.08 v18.41,21.08
SDA1  (via drill 0.38)
  Top 0.178: v41.78,21.08 41.78,23.62 41.01,24.39 J1.3 38.16,24.39 37.66,24.89 37.66,26.89 38.62,27.85 R3.1 | J6.3 52.44,25.39 51.94,24.89 v51.94,21.08 | U2.1 45.86,22.62 v44.32,21.08
  Bottom 0.178: J5.3 48.13,14.73 44.32,18.54 v44.32,21.08 | v41.78,21.08 v44.32,21.08 | v51.94,21.08 v44.32,21.08
SDA2  (via drill 0.38)
  Top 0.178: v67.69,21.08 67.69,23.62 66.92,24.39 J7.3 64.07,24.39 63.57,24.89 63.57,26.89 64.53,27.85 R8.1 | J9.3 78.35,25.39 77.85,24.89 v77.85,21.08 | U3.1 71.77,22.62 v70.23,21.08
  Bottom 0.178: J8.3 74.04,14.73 70.23,18.54 v70.23,21.08 | v67.69,21.08 v70.23,21.08 | v77.85,21.08 v70.23,21.08
SDA3  (via drill 0.38)
  Top 0.178: v15.88,46.99 15.88,49.53 15.11,50.3 J10.3 12.26,50.3 11.76,50.8 11.76,52.8 12.71,53.76 R11.1 | J12.3 26.54,51.3 26.04,50.8 v26.04,46.99 | U4.1 19.95,48.53 v18.41,46.99
  Bottom 0.178: J11.3 22.23,40.64 18.41,44.45 v18.41,46.99 | v15.88,46.99 v18.41,46.99 | v26.04,46.99 v18.41,46.99
SDA4  (via drill 0.38)
  Top 0.178: v41.78,46.99 41.78,49.53 41.01,50.3 J13.3 38.16,50.3 37.66,50.8 37.66,52.8 38.62,53.76 R14.1 | J15.3 52.44,51.3 51.94,50.8 v51.94,46.99 | U5.1 45.86,48.53 v44.32,46.99
  Bottom 0.178: J14.3 48.13,40.64 44.32,44.45 v44.32,46.99 | v41.78,46.99 v44.32,46.99 | v51.94,46.99 v44.32,46.99
SDA5  (via drill 0.38)
  Top 0.178: v67.69,46.99 67.69,49.53 66.92,50.3 J16.3 64.07,50.3 63.57,50.8 63.57,52.8 64.53,53.76 R17.1 | J18.3 78.35,51.3 77.85,50.8 v77.85,46.99 | U6.1 71.77,48.53 v70.23,46.99
  Bottom 0.178: J17.3 74.04,40.64 70.23,44.45 v70.23,46.99 | v67.69,46.99 v70.23,46.99 | v77.85,46.99 v70.23,46.99
SDA6  (via drill 0.38)
  Top 0.178: v15.88,72.9 15.88,75.44 15.11,76.21 J19.3 12.26,76.21 11.76,76.71 11.76,78.71 12.71,79.67 R20.1 | J21.3 26.54,77.21 26.04,76.71 v26.04,72.9 | U7.1 19.95,74.44 v18.41,72.9
  Bottom 0.178: J20.3 22.23,66.55 18.41,70.36 v18.41,72.9 | v15.88,72.9 v18.41,72.9 | v26.04,72.9 v18.41,72.9
SDA7  (via drill 0.38)
  Top 0.178: v41.78,72.9 41.78,75.44 41.01,76.21 J22.3 38.16,76.21 37.66,76.71 37.66,78.71 38.62,79.67 R23.1 | J24.3 52.44,77.21 51.94,76.71 v51.94,72.9 | U8.1 45.86,74.44 v44.32,72.9
  Bottom 0.178: J23.3 48.13,66.55 44.32,70.36 v44.32,72.9 | v41.78,72.9 v44.32,72.9 | v51.94,72.9 v44.32,72.9
SDA8  (via drill 0.38)
  Top 0.178: v67.69,72.9 67.69,75.44 66.92,76.21 J25.3 64.07,76.21 63.57,76.71 63.57,78.71 64.53,79.67 R26.1 | J27.3 78.35,77.21 77.85,76.71 v77.85,72.9 | U9.1 71.77,74.44 v70.23,72.9
  Bottom 0.178: J26.3 74.04,66.55 70.23,70.36 v70.23,72.9 | v67.69,72.9 v70.23,72.9 | v77.85,72.9 v70.23,72.9

## Text on the board
Bottom: X01 | X01 | X01 | X01 | X01 | X01 | X01 | X01 | X01
Dimension: vscore | vscore | vscore | vscore
tPlace: MLX90632 / Noncontact Thermo | MLX90632 / Noncontact Thermo | MLX90632 / Noncontact Thermo | GND | 3.3V | SDA | SCL | GND | 3.3V | SDA | SCL | GND | 3.3V | SDA | SCL | MLX90632 / Noncontact Thermo | MLX90632 / Noncontact Thermo | MLX90632 / Noncontact Thermo | GND | 3.3V | SDA | SCL | GND | 3.3V | SDA | SCL | GND | 3.3V | SDA | SCL | MLX90632 / Noncontact Thermo | MLX90632 / Noncontact Thermo | MLX90632 / Noncontact Thermo | GND | 3.3V | SDA | SCL | GND | 3.3V | SDA | SCL | GND | 3.3V | SDA | SCL
bPlace: MLX90632 / Noncontact Thermo | MLX90632 / Noncontact Thermo | MLX90632 / Noncontact Thermo | I2C ADR | I2C ADR | I2C ADR | GND | 3.3V | SDA | SCL | GND | 3.3V | SDA | SCL | GND | 3.3V | SDA | SCL | MLX90632 / Noncontact Thermo | MLX90632 / Noncontact Thermo | MLX90632 / Noncontact Thermo | I2C ADR | I2C ADR | I2C ADR | GND | 3.3V | SDA | SCL | GND | 3.3V | SDA | SCL | GND | 3.3V | SDA | SCL | MLX90632 / Noncontact Thermo | MLX90632 / Noncontact Thermo | MLX90632 / Noncontact Thermo | I2C ADR | I2C ADR | I2C ADR | GND | 3.3V | SDA | SCL | GND | 3.3V | SDA | SCL | GND | 3.3V | SDA | SCL